# Altium PCB PCB1_TRP.PcbDoc
Units mil, origin at the board's own origin, x right, y up, seen from the top; angles counter-clockwise.
Board outline 3625 x 3929.6 mil, 2 copper layers (Top Layer, Bottom Layer); 15 components, 15 nets, 64 pads, 6 vias.
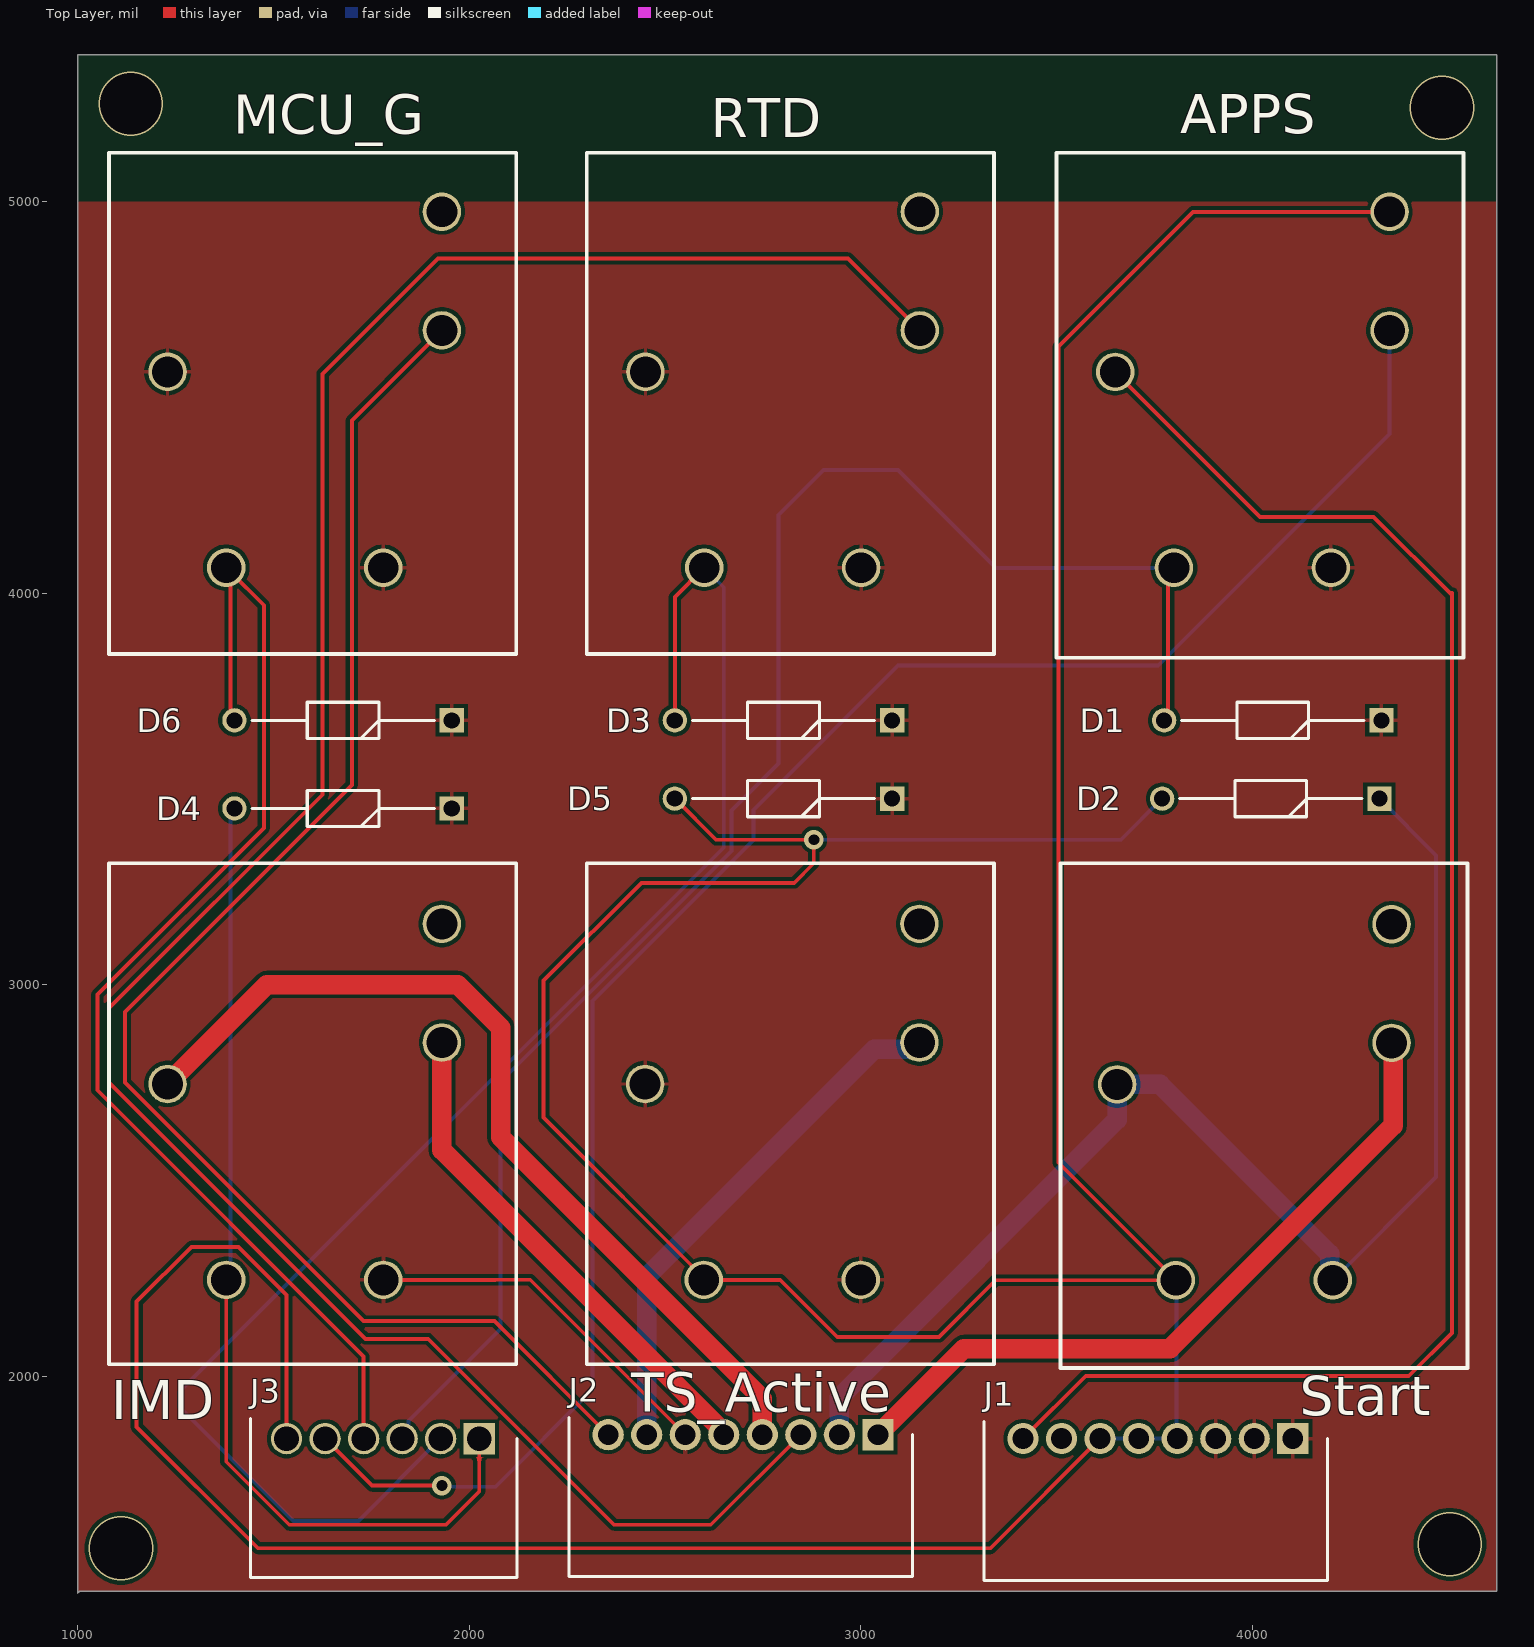
[diagram p0: Top Layer view]
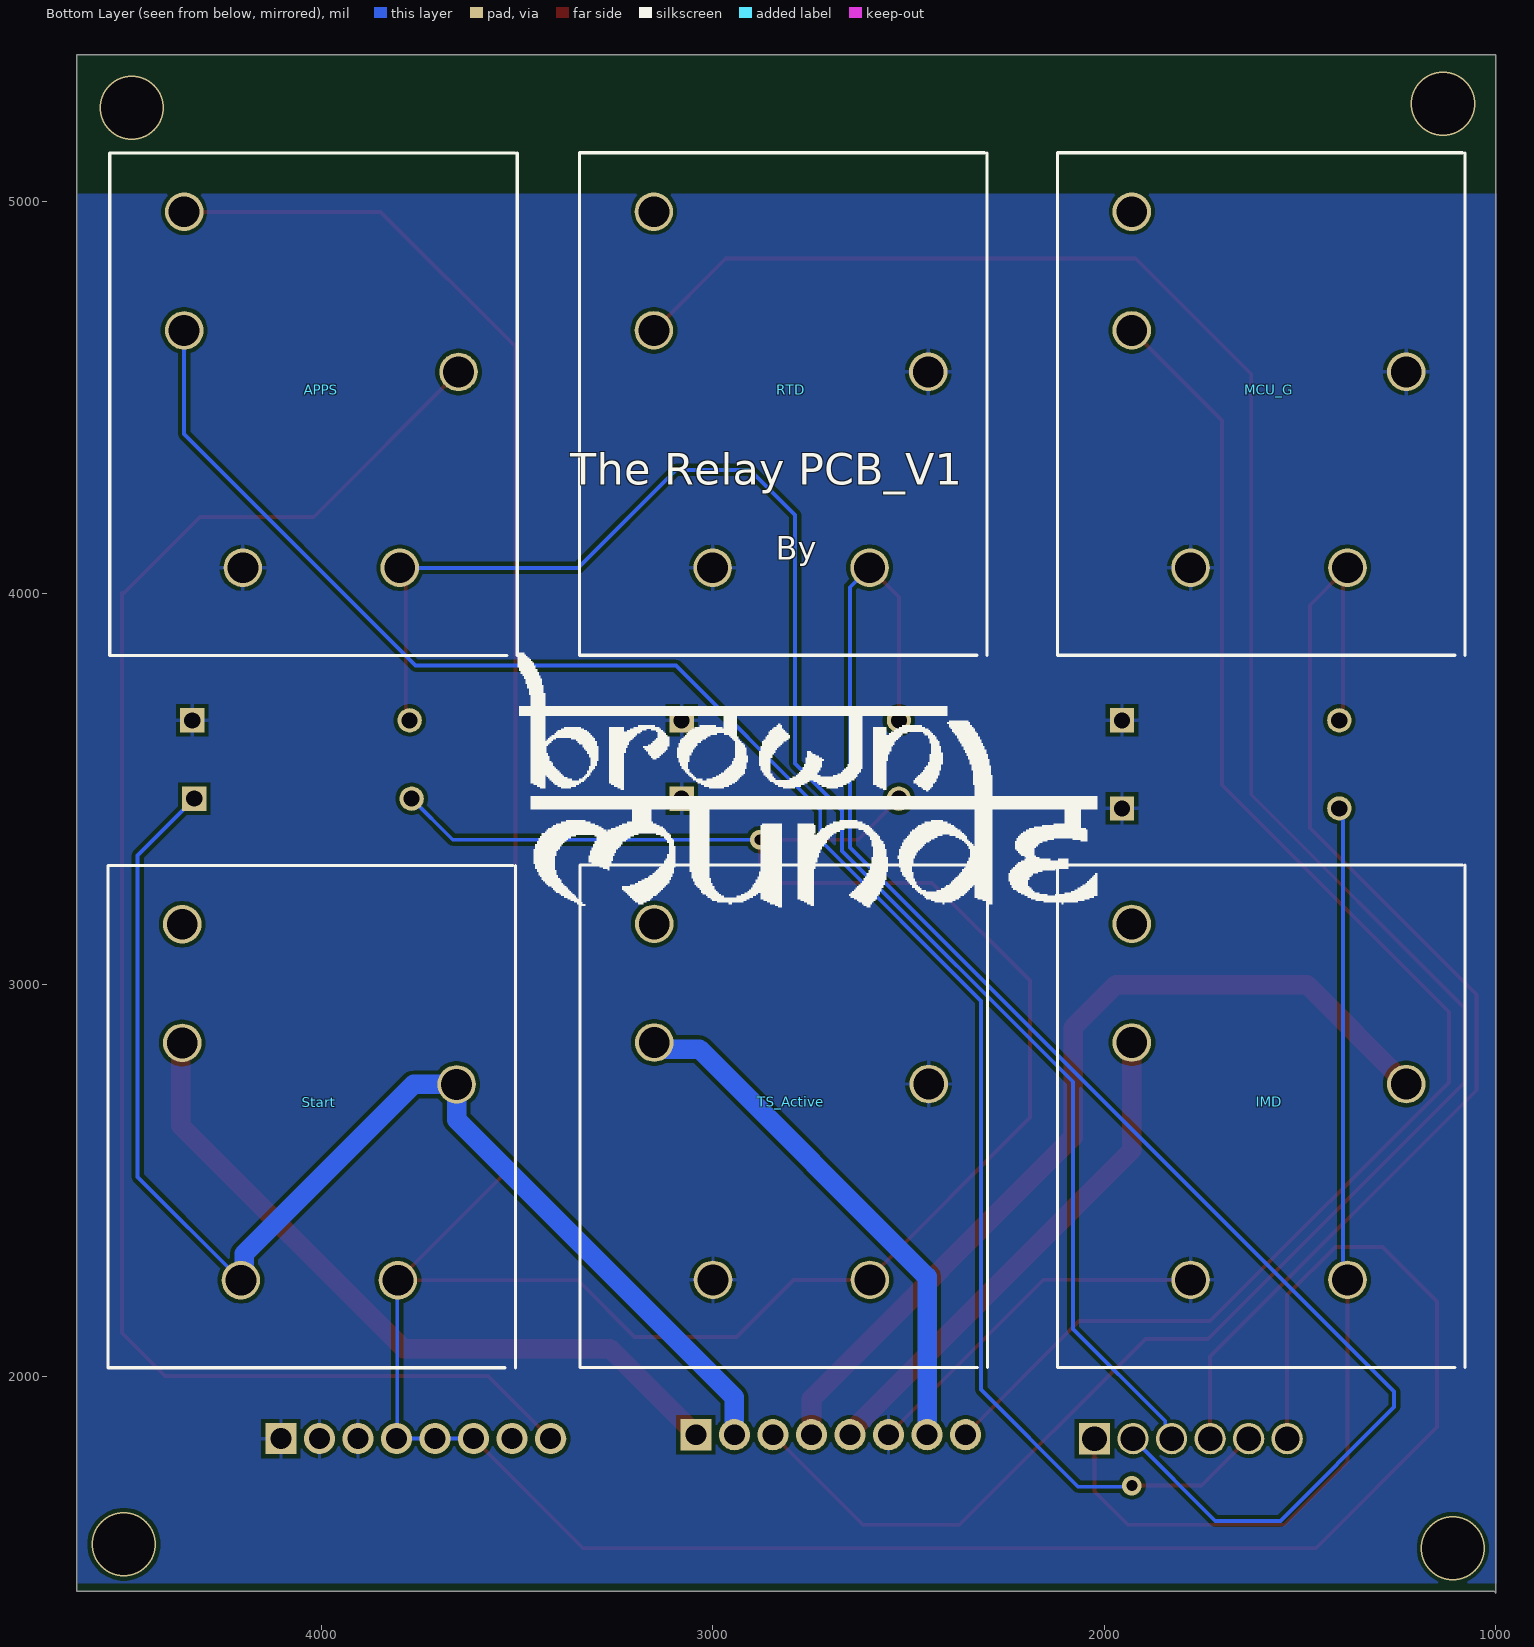
[diagram p1: Bottom Layer view, seen from below]
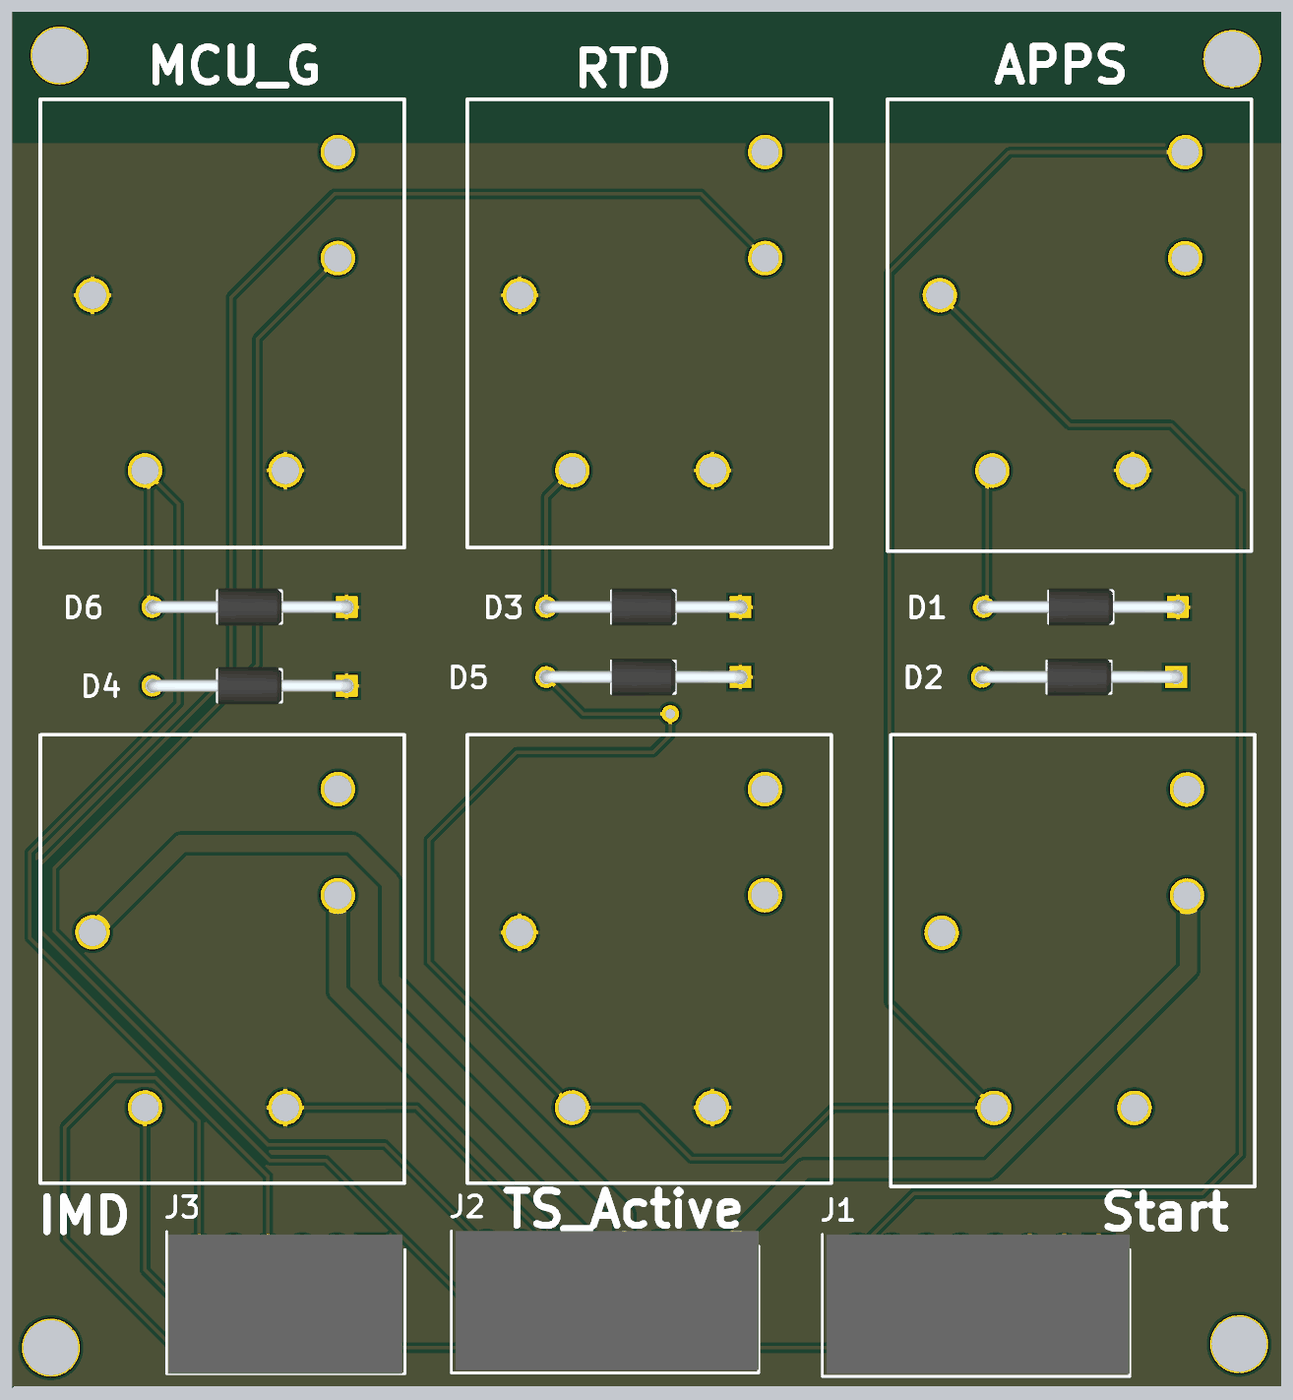
[diagram p2: 3D render of the assembled board from above, using the file's embedded part models]

## Layer stack, top to bottom
Top Solder: solder mask 0.4, Solder Resist, Dk 3.5
Top Layer: signal copper 1.4
Dielectric 1: dielectric 12.6, FR-4, Dk 4.8
Bottom Layer: signal copper 1.4
Bottom Solder: solder mask 0.4, Solder Resist, Dk 3.5

## Board outline
1000,1445.4 1004.6,1450 4625,1450 4625,5375 1000,5375 1000,1450

## Design rules (kind name [scope] priority, off if disabled: settings)
Clearance [All] p1: gap=10 ignorepadtopadclearanceinfootprint=FALSE except(0: Arc-Hole Track-Hole SMDPad-Hole THPad-Hole Via-Hole Fill-Hole Poly-Hole Region-Hole Text-Hole)
PolygonConnect [All] p1: connectstyle=Relief reliefconductorwidth=10 reliefentries=4 polygonreliefangle="90 Angle" airgapwidth=10
RoutingVias [All] p1: holewidth=28 width=50 viastyle="Through Hole" minholewidth=28 minwidth=50 maxholewidth=28 maxwidth=50
SolderMaskExpansion [All] p1: expansion=4 istentingtop=FALSE
SupplyNets "Schematic Supply Nets" [InNet('GND')] p1: voltage=0.000
Width [All] p1: maxlimit=60 minlimit=10 preferedwidth=10 minimp=50.000000 maximp=50.000000 favimp=50.000000
30 further rules are at their usual default settings.

## Classes and differential pairs
component class Sheet1_TRP: D1 D2 D3 D4 D5 D6 J1 J2 J3 TS_Active

## Components (designator, comment, footprint, x,y, rotation, side; value= is the part's Value field where it differs from the comment)
APPS "BSPD relay" RELAY 4201,4064.7 r90 bottom
D1 "1N4007-E3_73" DIOAD1405W86L465D235 4330.12,3675 r180 top
D2 "1N4007-E3_73" DIOAD1405W86L465D235 4325,3475 r180 top
D3 "1N4007-E3_73" DIOAD1405W86L465D235 3080.12,3675 r180 top
D4 "1N4007-E3_73" DIOAD1405W86L465D235 1955.12,3450 r180 top
D5 "1N4007-E3_73" DIOAD1405W86L465D235 3080.12,3475 r180 top
D6 "1N4007-E3_73" DIOAD1405W86L465D235 1955.12,3675 r180 top
IMD "BSPD relay" RELAY 1780,2245.6 r90 bottom
J1 "691382010008" SHDRRA8W80P0X250_1X8_2200X1010X830P 4103.7,1840 r180 top
J2 "691382010008" SHDRRA8W80P0X250_1X8_2200X1010X830P 3043.7,1850 r180 top
J3 "691382010006" SHDRRA6W100P0X250_1X6_1700X1010X830P 2025.28,1840 r180 top
MCU_G "BSPD relay" RELAY 1780,4065 r90 bottom
RTD "BSPD relay" RELAY 3001,4065 r90 bottom
Start "BSPD relay" RELAY 4206,2244.7 r90 bottom
TS_Active "BSPD relay" RELAY 3000,2245.6 r90 bottom

## Footprints (in the part's own frame and the unit in brackets; to place one, negate y for a bottom-side part, rotate by r counter-clockwise, add the part's x,y. Pads: shape width x height; smd on the part's side, far side on the other; paste and mask are expansions set on the pad)
DIOAD1405W86L465D235 [mm]
  rect 1.575x1.575 hole 1.05: 1(0,0)
  round 1.575 hole 1.05: 2(14.1,0)
  silkscreen extent 1.14,-1.17 12.96,1.17, body extent -0.43,-1.34 14.48,1.34, height 2.7
RELAY [mm]
  round 2.5 hole 2: GND(0,-10.185) IN(12.708,-13.995) NC(23.099,3.81) NO(15.4,3.81) VCC(0,0)
  silkscreen extent -5.68,-17.81 26.92,8.64
SHDRRA6W100P0X250_1X6_1700X1010X830P [mil]
  rect 80x80 hole 62.99: 1(0,0)
  round 80 hole 62.99: 2(98.43,0) 3(196.85,0) 4(295.28,0) 5(393.7,0) 6(492.13,0)
  silkscreen extent -96,-51 585,354, body extent -89,-43 581,354, height 327
SHDRRA8W80P0X250_1X8_2200X1010X830P [mm]
  rect 2.025x2.025 hole 1.35: 1(0,0)
  round 2.025 hole 1.35: 2(2.5,0) 3(5,0) 4(7.5,0) 5(10,0) 6(12.5,0) 7(15,0) 8(17.5,0)
  silkscreen extent -2.25,-1.1 20.05,9.2, body extent -2.25,-1.1 19.75,9, height 8.3

## Part data
APPS IMD MCU_G RTD Start TS_Active: library part leone_relay
D1 D2 D3 D4 D5 D6: "Diode", Arrow Part Number=1N4007-E3/73, Manufacturer_Name=Vishay, Mouser Part Number=625-1N4007-E3/73, Arrow Price/Stock=https://www.arrow.com/en/products/1n4007-e373/vishay?region=europe, Datasheet Link=https://mouser.componentsearchengine.com/Datasheets/2/1N4007-E3_73.pdf, Manufacturer_Part_Number=1N4007-E3/73, Mouser Price/Stock=https://www.mouser.co.uk/ProductDetail/Vishay-General-Semiconductor/1N4007-E3-73?qs=N4vtoAxH%2FSqT3Ng3e4K0Gw%3D%3D
J1 J2: "Connector", Manufacturer_Name="Wurth Elektronik", Mouser Part Number=710-691382010008, Datasheet Link=https://katalog.we-online.de/em/datasheet/6913820100xx.pdf, Height=8.3mm, Manufacturer_Part_Number=691382010008, Mouser Price/Stock=https://www.mouser.co.uk/ProductDetail/Wurth-Elektronik/691382010008?qs=a9WhcLg8qCws8OYIQRBfFA%3D%3D
J3: "Connector", Manufacturer_Name="Wurth Elektronik", Mouser Part Number=710-691382010006, Datasheet Link=https://katalog.we-online.de/em/datasheet/6913820100xx.pdf, Height=8.3mm, Manufacturer_Part_Number=691382010006, Mouser Price/Stock=https://www.mouser.co.uk/ProductDetail/Wurth-Elektronik/691382010006?qs=a9WhcLg8qCzBFK%252BQrj%2FNUg%3D%3D

## Via types
v1: diameter 165.35, hole 157.48, Top Layer to Bottom Layer, 4 vias
v2: diameter 50, hole 28, Top Layer to Bottom Layer, 2 vias

## Nets (pads, with @x,y where several pads share a name; then routed paths per layer and width w, separated by ;. In a path a pad name is that pad's centre, name@x,y a point inside that pad or via, vN(x,y) a via of type N, cw(c..) or ccw(c..) an arc to the next point about the centre after c; other vN are vias at no path point)
24_ok: J2.7 TS_Active.NO | length 1348
  Bottom Layer w50: J2.7 2453.15,2253.15 3034.98,2834.98 3133.08,2834.98 TS_Active.NO
24V: APPS.VCC D1.1 D3.1 D4.1 D5.1 D6.1 IMD.VCC J1.1 J1.2 J1.3 J2.6 MCU_G.IN MCU_G.VCC RTD.IN RTD.VCC TS_Active.IN TS_Active.VCC | length 935.7
  Top Layer w10: IMD.VCC 2065.6,2245.6 2065.86,2245.86 2155.72,2245.86 J2.6
acc_out: APPS.IN J1.8 | length 4193.2
  Top Layer w10: J1.8 3574.72,2000 4400,2000 4510,2110 4510,3995 ; APPS.IN 4020,4195 4310,4195 4510,3995 ; 4510,4000 4510,3995
acc_sig: APPS.NO J3.5 | length 4781.8
  Top Layer w10: J3.5 1751.57,1720 v2(1930,1720)
  Bottom Layer w10: v2@1922.92,1717.08 2067.08,1717.08 2315,1965 2315,2958.43 2725.95,3369.38 2725.95,3445.95 3095,3815 3760,3815 4351,4406 APPS.NO
APPS_ctrl: APPS.GND D1.2 J3.3 | length 4319.7
  Top Layer w10: D1.2 3784.95,3684.95 3784.95,4049.65 APPS.GND
  Bottom Layer w10: J3.3 1844.59,1856.17 1844.59,1884.59 2080,2120 2080,2751.72 2670,3341.72 2670,3445 2790,3565 2790,4200 2905,4315 3095,4315 3345.3,4064.7 APPS.GND
from_BSPD: IMD.IN J2.4 | length 2318.7
  Top Layer w50: IMD.IN 1483.1,3000 1970,3000 2080,2890 2080,2610 2748.43,1941.57 J2.4
GND: APPS.NC D2.2 D5.2 J1.4 J1.5 J1.6 J3.6 Start.GND TS_Active.GND | length 12452.2
  Top Layer w10: J3.6 1533.15,2206.85 1410,2330 1290,2330 1150,2190 1150,1870 1460,1560 3331.57,1560 J1.6 ; D5.2 2630,3370 v2(2880,3370) 2880,3310 2830,3260 2440,3260 2190,3010 2190,2660 2599,2251 TS_Active.GND 2794.4,2245.6 2940,2100 3200,2100 3344.7,2244.7 Start.GND 3505,2544.7 3505,4630 3849.1,4974.1 APPS.NC
  Bottom Layer w10: v2(2880,3370) 3664.88,3370 D2.2 ; J1.6 J1.5 J1.4 3806.71,1841.71 3806.71,2242.99 Start.GND
IMD_ctrl: D4.2 IMD.GND J3.1 | length 2560.7
  Top Layer w10: IMD.GND 1379,1781 1540,1620 1940,1620 2025.28,1705.28 J3.1
  Bottom Layer w10: IMD.GND 1390.05,2256.65 1390.05,3440.05 D4.2
MCU_G_ctrl: D6.2 J3.4 MCU_G.GND | length 3105.5
  Top Layer w10: MCU_G.GND MCU_G.GND@1390.05,4053.95 ; D6.2 1390.05,3684.95 MCU_G.GND@1390.05,4053.95 ; J3.4 1730,2050 1050,2730 1050,2975 1475,3400 1475,3969 MCU_G.GND@1390.05,4053.95
mcug_out: J2.8 MCU_G.NO | length 3864.3
  Top Layer w10: MCU_G.NO 1700,4441.3 1700,3510 1120,2930 1120,2750 1730,2140 2064.72,2140 J2.8
RTD_ctrl: D3.2 J3.2 RTD.GND | length 4036.3
  Top Layer w10: D3.2 2525,3990 RTD.GND
  Bottom Layer w10: J3.2 1716.85,1630 1550.37,1630 1260,1920.37 1260,1960 2650,3350 2650,4015 RTD.GND
RTD_out: J2.3 RTD.NO | length 6090.2
  Top Layer w10: J2.3 2616.85,1620 2370,1620 1895,2095 1735,2095 1080,2750 1080,2940 1625,3485 1625,4560 1920,4855 2967.3,4855 RTD.NO
start_bttn_in: J2.1 Start.NO | length 1865.5
  Top Layer w50: J2.1 3263.7,2070 3790,2070 4360,2640 4360,2847 Start.NO
  Bottom Layer w50: Start.NO@4346.73,2851 Start.NO
start_bttn_out: D2.1 J2.2 Start.IN Start.VCC | length 3381.7
  Bottom Layer w10: Start.VCC 4470,2508.7 4470,3330 D2.1
  Bottom Layer w50: J2.2 2945.28,1945.28 3655,2655 Start.IN 3765,2745 4197.82,2312.18 4197.82,2252.88 Start.VCC
To_AMS: IMD.NO J2.5 | length 1300.1
  Top Layer w50: IMD.NO 1930,2577.45 2650,1857.45 J2.5
pads on no net: IMD.NC J1.7 MCU_G.NC RTD.NC Start.NC TS_Active.NC
copper on no net:
  other v1: 1110,1560 4505,1570 4485,5240 1135,5250

## Polygon pours and split planes (outlines as drawn)
24V on Bottom Layer "24V_L02_P001" (solid, pour order 1): 997.5,5020 997.5,1470 4622.5,1470 4622.5,5020
24V on Top Layer "24V_L01_P000" (solid, pour order 0): 1000,5000 1000,1450 4625,1450 4625,5000

## Silkscreen, mask and mechanical layers (free items; w line width, h text height)
Top Overlay:
  lines w10: 1080,2030 2120,2030 2120,3310 1080,3310 1080,2030 ; 1080,3845 2120,3845 2120,5125 1080,5125 1080,3845 ; 2300,2030 3340,2030 3340,3310 2300,3310 2300,2030 ; 2300,3845 3340,3845 3340,5125 2300,5125 2300,3845 ; 3500,3835 4540,3835 4540,5125 3500,5125 3500,3835 ; 3510,2020 4550,2020 4550,3310 3510,3310 3510,2020
Bottom Overlay:
  drawing of 5 lines, arcs and shapes, not listed
  text "The Relay PCB_V1" at 3365,4276.66 h80
  text "By" at 2840,4084.99 h60